# Altium PCB PMP9755.PcbDoc
Units mil, origin at the board's own origin, x right, y up, seen from the top; angles counter-clockwise.
Board outline 3100 x 2000 mil, 2 copper layers (L1 Top Layer, L2 Bottom Layer), stack 62 mil thick; 34 components, 15 nets, 92 pads, 25 vias.
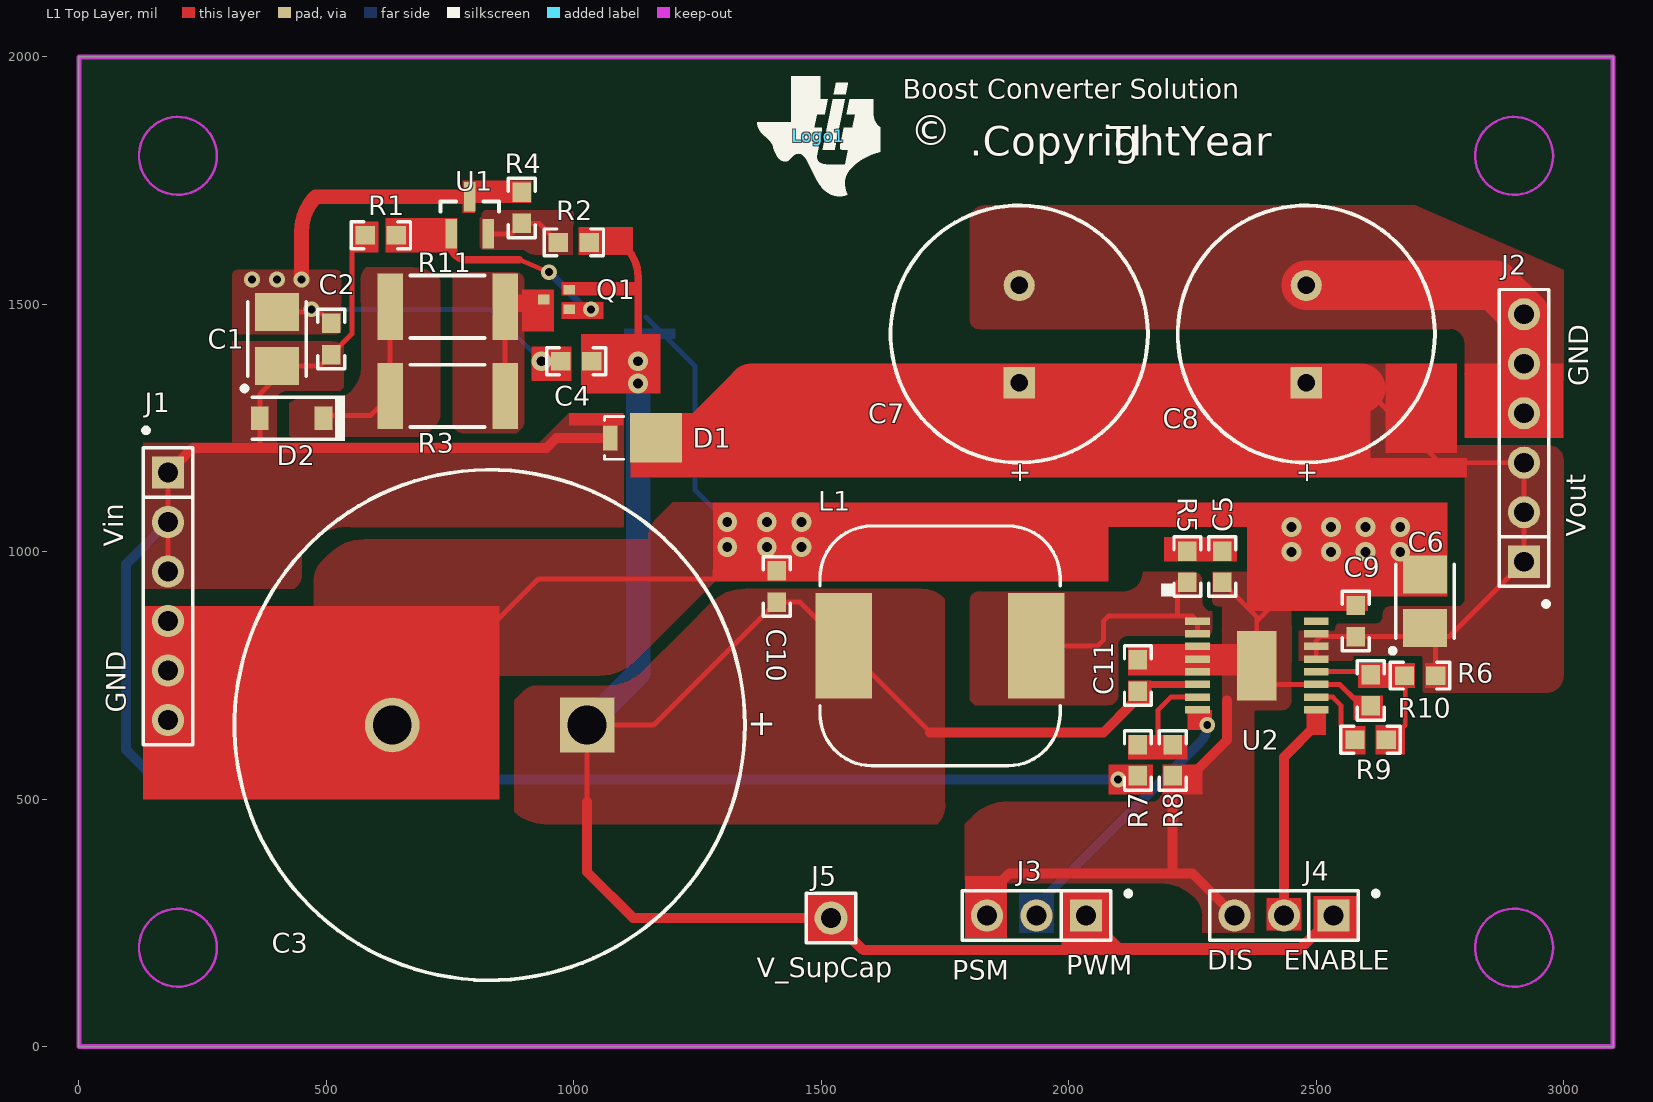
[diagram p0: L1 Top Layer view]
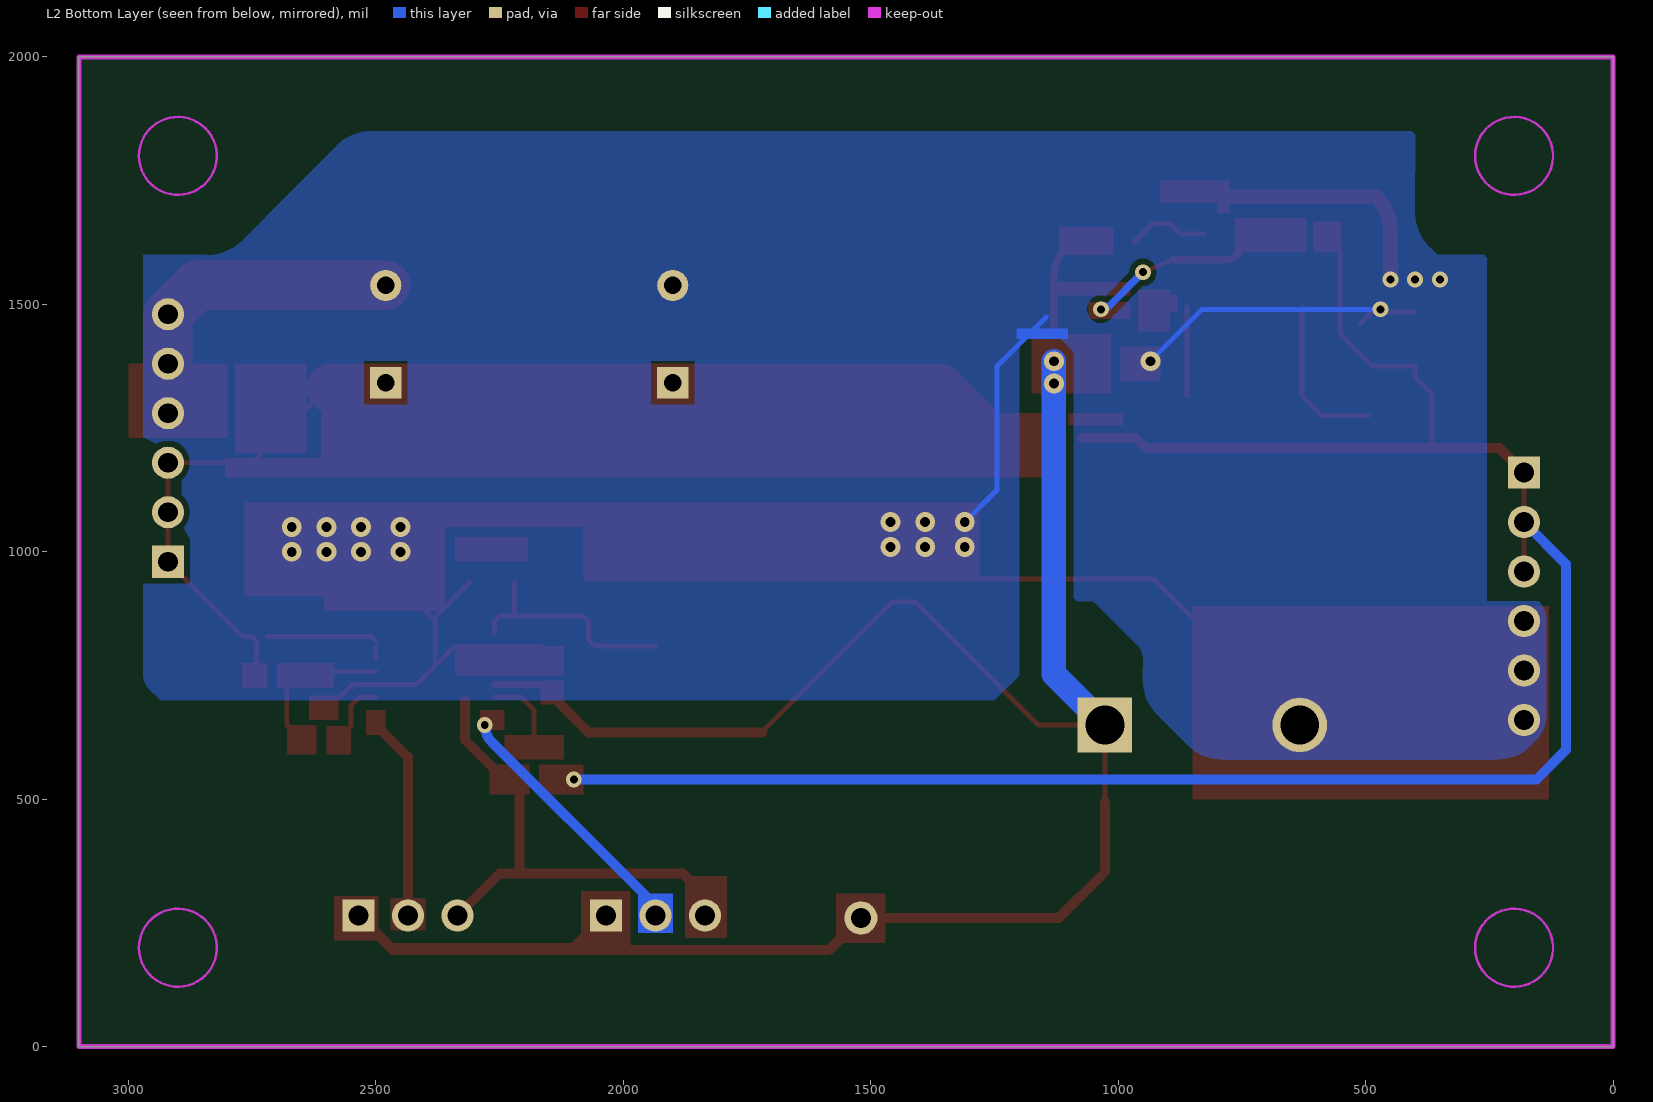
[diagram p1: L2 Bottom Layer view, seen from below]

## Layer stack, top to bottom
L1 Top Layer: signal copper 1.4
Dielectric: core 59.2, FR-4, Dk 4.8
L2 Bottom Layer: signal copper 1.4

## Board outline
0,0 3100,0 3100,2000 0,2000 0,0

## Design rules (kind name [scope] priority, off if disabled: settings)
AcuteAngle [All] p1: minimum=4.50000000000000E+0001 checktracksonly=FALSE
AssemblyTestPointUsage [All] p1: valid=2
Clearance Clearance_BoardEdge_MountingHoles [OnCopper and InComponentClass('Mounting Holes') vs IsKeepOut] p1: gap=40
Clearance Clearance_BoardEdge_Poly [OnCopper and InPoly vs IsKeepOut] p2: gap=25
Clearance Clearance_BoardEdge [OnCopper and Not InComponentClass('Logo') and not InComponentClass('FiducialMark') and not InRegion(1000,500,4000,800) and Not IsKeepout vs IsKeepOut] p3: gap=60
Clearance Clearance_Poly [InPolygon] p4: gap=12
Clearance [All] p5: gap=8
ComponentClearance ComponentClearance_Shunt [InComponentClass('Header') vs InComponentClass('Shunt')] p1: gap=0 collisioncheckmode=3 verticalgap=0 showdistances=FALSE
ComponentClearance ComponentClearance_Logo [InComponentClass('Logo')] p2: gap=50 collisioncheckmode=3 verticalgap=10 showdistances=FALSE
ComponentClearance ComponentClearance_ScrewToNut [(HasFootprint('NY PMS 440 0025 PH')) vs (HasFootprint('Keystone_1902C'))] p3: gap=5 collisioncheckmode=3 verticalgap=10 showdistances=FALSE
ComponentClearance ComponentClearance_MountingHoles [InComponentClass('Mounting Holes')] p4: gap=250 collisioncheckmode=3 verticalgap=100000 showdistances=FALSE
ComponentClearance ComponentClearance_SmallPassives [HasFootprint('0201*') or HasFootprint('0402*') or HasFootprint('0508') or HasFootprint('0603*') or HasFootprint('0612') or HasFootprint('0805*') or HasFootprint('0815*') or HasFootprint('0830*') or HasFootprint('1206*') or HasFootprint('1210*') or HasFootprint('1808*') or HasFootprint('1812*') or HasFootprint('1825*') or HasFootprint('2010*') or HasFootprint('2220*') or HasFootprint('2225*') or HasFootprint('2512*') or HasFootprint('2728*') or HasFootprint('3518*') vs HasFootprint('0201*') or HasFootprint('0402*') or HasFootprint('0508') or HasFootprint('0603*') or HasFootprint('0612') or HasFootprint('0805*') or HasFootprint('0815*') or HasFootprint('0830*') or HasFootprint('1206*') or HasFootprint('1210*') or HasFootprint('1808*') or HasFootprint('1812*') or HasFootprint('1825*') or HasFootprint('2010*') or HasFootprint('2220*') or HasFootprint('2225*') or HasFootprint('2512*') or HasFootprint('2728*') or HasFootprint('3518*')] p5: gap=20 collisioncheckmode=3 verticalgap=10 showdistances=FALSE
ComponentClearance ComponentClearance_THtoSMT [IsThruComponent vs IsSMTComponent] p6: gap=20 collisioncheckmode=3 verticalgap=30 showdistances=FALSE
ComponentClearance ComponentClearance_THtoTH [IsThruComponent vs IsThruComponent] p7: gap=20 collisioncheckmode=3 verticalgap=30 showdistances=FALSE
ComponentClearance [All] p8: gap=20 collisioncheckmode=3 verticalgap=10 showdistances=FALSE
DiffPairsRouting [All] p1: maxlimit=100 minlimit=10 mostfreqgap=10 maxuncoupledlength=1000
FabricationTestPointUsage TestPointUsage [All] p1: valid=2 allowmultiple=FALSE
FabricationTestpoint Testpoint [All] p1: side=3 testpointundercomponent=TRUE minsize=40 maxsize=100 preferedsize=60 minholesize=0 maxholesize=40 preferedholesize=32 testpointgrid=1 allowsidetop=TRUE allowsidebottom=TRUE usegrid=TRUE gridtolerance=0.01
FanoutControl Fanout_LCC [IsLCC] p1: bgadir=Out bgaviamode=Centered fanoutstyle=Auto fanoutdirection=Alternating viagrid=1 // Fanout_LCC (Default Rule)
FanoutControl Fanout_BGA [IsBGA] p2: bgadir=Out bgaviamode=Centered fanoutstyle=Auto fanoutdirection=Alternating viagrid=1 // Fanout_BGA (Default Rule)
FanoutControl Fanout_Default [All] p4: bgadir=Out bgaviamode=Centered fanoutstyle=Auto fanoutdirection=Alternating viagrid=1 // Fanout_Default (Default Rule)
FanoutControl Fanout_Small [(CompPinCount < 5)] p5: bgadir=Out bgaviamode=Centered fanoutstyle=Auto fanoutdirection=OutThenIn viagrid=1 // Fanout_Small (Default Rule)
HoleSize [All] p1: absolutevalues=TRUE maxlimit=251 minlimit=8 maxpercent=80.000 minpercent=20.000
MinimumAnnularRing MinimumAnnularRing_ThermalPadVias [IsVia and InAnyComponent] p1: minimumring=5.91
MinimumAnnularRing [All] p2: minimumring=9
MinimumSolderMaskSliver MinimumSolderMaskSliver_Logo [InComponentClass('Logo') vs InComponentClass('Logo')] p1: minsoldermaskwidth=0.7
MinimumSolderMaskSliver [All] p2: minsoldermaskwidth=3.94
PlaneConnect [All] p1: planeconnectstyle=Relief reliefexpansion=10 reliefentries=4 reliefconductorwidth=10 reliefairgap=10
PolygonConnect [All] p1: connectstyle=Direct reliefconductorwidth=10 reliefentries=4 polygonreliefangle="90 Angle" airgapwidth=10
RoutingVias ThermalPadVias [IsVia and InAnyComponent] p1: holewidth=7.87 width=19.68 viastyle="Through Hole" minholewidth=7.87 minwidth=19.68 maxholewidth=12.99 maxwidth=23.62
RoutingVias [All] p2: holewidth=16 width=34 viastyle="Through Hole" minholewidth=7.87 minwidth=26 maxholewidth=40 maxwidth=65
SMDToCorner [All] p1: distance=30000
SilkToSilkClearance [All] p1: silktosilkclearance=5
SilkscreenOverComponentPads [All] p1: minsilkscreentomaskgap=5
SolderMaskExpansion [All] p1: expansion=1.97
Width [All] p1: maxlimit=100 minlimit=6 preferedwidth=10 checkconnectedcopper=TRUE
14 further rules are at their usual default settings.

## Classes and differential pairs
component class Logo: Logo1
component class Header: J1 J2 J3 J4
component class PWP9755_Cover: Logo1

## Components (designator, comment, footprint, x,y, rotation, side; value= is the part's Value field where it differs from the comment)
C1 "T520B157M006ATE070" 3528-21 400,1430 r90 top
C2 "GRM188R61A225KE34D" 0603 510,1430 r90 top
C3 "HVZ0E107NF-LT" HV_2500x5000 830,650 r180 top
C4 "GRM188R60J225KE19D" 0603 1005,1385 r180 top
C5 "GRM1885C1H101JA01D" 0603 2310,970 r270 top
C6 "T520B157M006ATE070" 3528-21 2720,900 r90 top
C7 "EEUFR0J472" FR_1250x2500 1900,1440 r90 top
C8 "EEUFR0J472" FR_1250x2500 2480,1440 r90 top
C9 "GRM188R61C475KAAJ" 0603 2580,860 r90 top
C10 "GRM188R61A106ME69" 0603 1410,930 r90 top
C11 "GRM185R60J105KE26D" 0603 2140,750 r90 top
D1 "SS1P3L-M3/84A" DO-220AA 1120,1230 r180 top
D2 "MBR0520LT1G" SOD-123 430,1270 r180 top
J1 "TSW-106-07-G-S" TSW-106-07-G-S 180,910 r270 top
J2 "TSW-106-07-G-S" TSW-106-07-G-S 2920,1230 r90 top
J3 "TSW-103-07-G-S" TSW-103-07-G-S 1935,265 r180 top
J4 "TSW-103-07-G-S" TSW-103-07-G-S 2435,265 r180 top
J5 "TSW-101-17-T-S" Samtec_TSW-101-17-T-S 1520,260 r0 top
L1 "CDRH127NP-6R1NC" cdrh127 1740,810 r0 top
Logo1 "Boost Converter Solution" TI_Symbol_Overlay_Medium 1495,1840 r0 top
Q1 "SI1012CR-T1-GE3-ND" SOT-416 965,1510 r180 top
R1 "CRCW06031K00JNEA" 0603 610,1640 r0 top
R2 "RT0603BRD075K97L" 0603 1000,1625 r0 top
R3 "CRCW251249R9FKEG" 2512 745,1315 r0 top
R4 "RT0603DRE07100KL" 0603 895,1695 r90 top
R5 "CRCW0603100RJNEA" 0603 2240,970 r270 top
R6 "RC0603FR-071ML" 0603 2710,750 r0 top
R7 "RC0603FR-07909KL" 0603 2140,578.5 r90 top
R8 "RT0603DRE07100KL" 0603 2210,578.5 r90 top
R9 "RC0603FR-071ML" 0603 2610,620 r180 top
R10 "CRCW0603124KFKEA" 0603 2610,720 r90 top
R11 "CRCW251249R9FKEG" 2512 745,1495 r0 top
U1 "TL431AIDBZR" DBZ0003A_N 790,1680 r90 top
U2 "TPS61030PWP" PWP16 2380,770 r0 top

## Footprints (in the part's own frame and the unit in brackets; to place one, negate y for a bottom-side part, rotate by r counter-clockwise, add the part's x,y. Pads: shape width x height; smd on the part's side, far side on the other; paste and mask are expansions set on the pad)
0603 [mm] "0603 from SM-752 data"
  rect 1x0.95 smd: 1(-0.8,0) 2(0.8,0)
  silkscreen extent -1.52,-0.69 1.52,0.69, body extent -0.87,-0.47 0.87,0.47, height 0.85
2512 [mm] "Chip Resistor, Body 6.3x3.2mm, IPC Medium Density"
  rect 1.3x3.4 smd: 1(-2.95,0) 2(2.95,0)
  silkscreen extent -1.9,-1.6 1.9,1.6, body extent -3.22,-1.67 3.22,1.67, height 0.71
3528-21 [mm] "Medium Density IPC, based on SM-782 section 8.4"
  rect 1.95x2.25 smd: 1(-1.375,0) 2(1.375,0)
  silkscreen extent -2.66,-1.5 1.9,1.79, body extent -1.85,-1.5 1.85,1.5, height 2.1
cdrh127 [mm] "Sumida recommended land pattern"
  rect 2.9x5.4 smd: 1(-4.95,0) 2(4.95,0)
  silkscreen extent -6.16,-6.15 6.16,6.15, body extent -6.15,-6.15 6.15,6.15, height 8
DBZ0003A_N [mm] "SOT23, 3-Leads, Body 2.9x1.3mm, Pitch 0.95mm, Lead Span 2.4mm, IPC Medium Density"
  rect 1.5x0.6 smd: 1(-0.95,0.95) 2(-0.95,-0.95) 3(0.95,0)
  silkscreen extent 0.2,-1.5 0.7,1.5, body extent -1.26,-1.46 1.26,1.46, height 0.96
DO-220AA [mil] "Vishay recommended land pattern 12-Mar-12"
  rect 105.12x100 smd: 1(-46.28,0)
  rect 30x50 smd: 2(46.28,0)
  silkscreen extent 19,-43 58,43, body extent -96,-45 59,45, height 46
FR_1250x2500 [mm] "PANASONIC"
  rect 1.6x1.6 hole 0.9: 1(-2.5,0)
  round 1.6 hole 0.9: 2(2.5,0)
  silkscreen extent -6.6,-6.6 6.6,6.6, body extent -6.45,-6.49 6.49,6.49, height 27.01
HV_2500x5000 [mm] "KEMET"
  rect 2.8x2.8 hole 2: 1(-5,0)
  round 2.8 hole 2: 2(5,0)
  silkscreen extent -13.1,-13.1 13.1,13.1, body extent -12.9,-12.98 12.96,12.98, height 52.01
PWP16 [mil]
  rect 50x15 smd: 1(-119.8,90) 2(-119.8,64.4) 3(-119.8,38.8) 4(-119.8,13.2) 5(-119.8,-12.4) 6(-119.8,-38) 7(-119.8,-63.6) 8(-119.8,-89.2) 9(120.2,-89.2) 10(120.2,-63.6) 11(120.2,-38) 12(120.2,-12.4) 13(120.2,13.2) 14(120.2,38.8) 15(120.2,64.4) 16(120.2,90)
  rect 80x140 smd: 17(0,0)
  silkscreen extent -193,140 -168,166
Samtec_TSW-101-17-T-S [mm] "Samtec,CONN HEADER 1POS .100\" SNGL TIN"
  round 1.7 hole 1.02 mask+0.05: 1(0,0)
  silkscreen extent -1.27,-1.27 1.27,1.27, body extent -1.27,-1.27 1.27,1.27, height 18.29
SOD-123 [mm] "On Semi recommended land pattern"
  rect 0.915x1.22 smd: 1(-1.637,0) 2(1.637,0)
  silkscreen extent -2.74,-1.17 2.03,1.17, body extent -1.93,-0.9 1.93,0.9, height 1.35
SOT-416 [mm] "NXP recommended footprint."
  rect 0.6x0.5 smd: 1(-0.65,0.5) 2(-0.65,-0.5) 3(0.65,0)
  body extent -0.8,-0.9 0.8,0.9, height 0.82
TI_Symbol_Overlay_Medium [mil]
  silkscreen extent -124,-122 124,120
TSW-103-07-G-S [mm] "Samtec 100mil, 1x3, 230 mil above insulator"
  rect 1.65x1.65 hole 1.016 mask+0: 1(-2.54,0)
  round 1.65 hole 1.016 mask+0: 2(0,0) 3(2.54,0)
  silkscreen extent -4.84,-1.27 3.81,1.27, body extent -3.81,-1.27 3.81,1.27, height 8.38
TSW-106-07-G-S [mm] "Samtec 100mil, 1x6, 230 mil above insulator"
  rect 1.65x1.65 hole 1.016 mask+0: 1(-6.35,0)
  round 1.65 hole 1.016 mask+0: 2(-3.81,0) 3(-1.27,0) 4(1.27,0) 5(3.81,0) 6(6.35,0)
  silkscreen extent -8.64,-1.27 7.62,1.27, body extent -7.62,-1.27 7.62,1.27, height 8.38

## Part data
C1 C6: "CAP, TA, 150uF, 6.3V, +/-20%, 0.07 ohm, SMD"
C2: "CAP, CERM, 2.2uF, 10V, +/-10%, X5R, 0603"
C3: "CAP, Electric Double Layer, 100 F, 2.7 V, +30/-50%, 0.03 ohm, TH"
C4: "CAP, CERM, 2.2uF, 6.3V, +/-10%, X5R, 0603"
C5: "CAP, CERM, 100pF, 50V, +/-5%, C0G/NP0, 0603"
C7 C8: "CAP, AL, 4700uF, 6.3V, +/-20%, 0.015 ohm, TH"
C9: "CAP, CERM, 4.7 µF, 16 V, +/- 10%, X5R, 0603"
C10: "CAP, CERM, 10uF, 10V, +/-20%, X5R, 0603"
C11: "CAP, CERM, 1uF, 6.3V, +/-10%, X5R, 0603"
D1: "Diode, Schottky, 30V, 1.5A, DO-220AA"
D2: "Diode, Schottky, 20V, 0.5A, SOD-123"
J1 J2: "Header, TH, 100mil, 6x1, Gold plated, 230 mil above insulator"
J3 J4: "Header, TH, 100mil, 3x1, Gold plated, 230 mil above insulator"
J5: "CONN HEADER 1POS .100\" SNGL TIN, TH"
L1: "Inductor, Shielded Drum Core, Ferrite, 6.1uH, 6.6A, 0.0176 ohm, SMD"
Logo1: library part TI_Logo, "Texas Instrument Corporate Signature"
Q1: "MOSFET, N/P-CH, 20V, 0.63A, SOT-416"
R1: "RES, 1.0k ohm, 5%, 0.1W, 0603"
R2: "RES, 5.97k ohm, 0.1%, 0.1W, 0603"
R3 R11: "RES, 49.9 ohm, 1%, 1W, 2512"
R4 R8: "RES, 100k ohm, 0.5%, 0.1W, 0603"
R5: "RES, 100 ohm, 5%, 0.1W, 0603"
R6 R9: "RES, 1.00Meg ohm, 1%, 0.1W, 0603"
R7: "RES, 909k ohm, 1%, 0.1W, 0603"
R10: "RES, 124k ohm, 1%, 0.1W, 0603"
U1: "Adjustable Precision Shunt Regulator, 34 ppm / degC, 100 mA, -40 to 85 degC, 3-pin SOT-23 (DBZ), Green (RoHS & no Sb/Br)"
U2: "IC, Li ION, Boost converter, Adj V."

## Via types
v1: diameter 40, hole 20, L1 Top Layer to L2 Bottom Layer, 17 vias
v2: diameter 32, hole 16, L1 Top Layer to L2 Bottom Layer, 8 vias

## Nets (pads, with @x,y where several pads share a name; then routed paths per layer and width w, separated by ;. In a path a pad name is that pad's centre, name@x,y a point inside that pad or via, vN(x,y) a via of type N, cw(c..) or ccw(c..) an arc to the next point about the centre after c; other vN are vias at no path point)
EN: J4.2 U2.9 | length 411.9
  L1 Top Layer w20: J4.2 2435,585 2500,650
GND: C1.2 C2.2 C3.2 C4.2 C5.2 C6.2 C7.2 C8.2 C9.2 C10.2 C11.2 J1.4 J1.5 J1.6 J2.4 J2.5 J2.6 J3.3 J4.3 R4.2 R8.1 R10.1 U1.3 U2.3 U2.4 U2.5 U2.11 U2.17 | length 5382
  L1 Top Layer w10: C1.2 487.36,1484.13 C2.2 ; C3.2 928.15,945 1290,945 ; U1.3 885.91,1717.4 R4.2 R4.2@898.5,1730 ; v1(935,1385) C4.2 ; C11.2 2167.3,808.8 U2.3 ; U2.5 U2.4 U2.3 ; C5.2 2380,868.5 2380,860 ; R10.1@2610,698.5 2581.5,698.5 2548,732 U2.11 2418,732 U2.17 ; C6.2 2632.64,954.13 2570,891.5 2411.5,891.5 2380,860 ; U2.3 2341.2,808.8 U2.17 ; U2.17 2380,860
  L1 Top Layer w20: J3.3 1835,305 1880,350 2250,350 J4.3 ; 2210,355 R8.1 2247.01,547.01 2320,620 2320,700
  L1 Top Layer w30: v2(450,1550) 450,1647.82 cw(c548.41,1647.82) 478.82,1717.4 U1.3
  L1 Top Layer w100: C8.2 2861.57,1538.43 J2.6 J2.5 J2.4
  L2 Bottom Layer w10: v2(470,1490) 830,1490 v1(935,1385) ; C3.2@623.15,660 C3.2 ; 1145,1475 1245,1375 1245,1125 v1(1310,1060)
  L2 Bottom Layer w20: J4.3@2325,255 J4.3
  other v1: 2450,1000 2530,1000 2600,1000 2670,1000 1310,1010 1390,1010 1460,1010 2450,1050 2530,1050 2600,1050 2670,1050 1390,1060 1460,1060
  other v2: 350,1550 400,1550
NetC5_1: C5.1 R5.1 | length 90
  L1 Top Layer w10: 2220,1001.5 C5.1
NetD2_1: D2.1 R3.1 R11.1 | length 331
  L1 Top Layer w10: D2.1@494.47,1275 588.86,1275 R3.1 R11.1
NetL1_2: L1.2 R5.2 U2.1 U2.2 | length 471
  L1 Top Layer w10: L1.2 2058.5,810 2070,821.5 2070,860 2080,870 2220,870 ; 2220,938.5 2220,870 ; U2.2 U2.1 2250.2,870 2220,870
NetQ1_1: Q1.1 R1.2 U1.1 | length 468.2
  L1 Top Layer w10: R1.2 750,1640 U1.1 ; 890,1590 v2(950,1565)
  L1 Top Layer w15: U1.1 752.6,1617.87 ccw(c777.87,1617.87) 752.6,1617.4 ccw(c777.87,1617.87) 760,1600 ccw(c784.14,1624.14) 779.71,1590.29 ccw(c784.14,1624.14) 784.14,1590 890,1590
  L2 Bottom Layer w15: v2(950,1565) 1019.5,1495.5 v2@1035,1495.5
  other v2: 1035,1490
NetQ1_3: Q1.3 R3.2 R11.2 | length 180
  L1 Top Layer w10: R3.2 R11.2
NetR2_1: R2.1 R4.1 U1.2 | length 165.7
  L1 Top Layer w10: U1.2 874.09,1642.6 R4.1 930,1663.5 R2.1
NetR6_1: R6.1 R9.1 R10.2 U2.12 | length 302.8
  L1 Top Layer w10: U2.12 2501.1,758.5 2680,758.5 2680,650.02 2669.98,640
NetR7_2: R7.2 R8.2 U2.7 | length 221.1
  L1 Top Layer w10: R7.2 R8.2 ; 2180,620 2180,680 2206.4,706.4 U2.7
NetR9_2: R9.2 U2.10 | length 138.4
  L1 Top Layer w10: U2.10 2533.6,706.4 2550,690 2550,648.5 R9.2
SYNC: J3.2 U2.8 | length 523.7
  L2 Bottom Layer w20: J3.2 cw(c1983.28,265) 1949.14,299.14 2265.86,615.86 ccw(c2231.72,650) v2(2280,650)
V_SUP: C3.1 C4.1 C10.1 C11.1 J3.1 J4.1 J5.1 L1.1 Q1.2 R2.2 U2.6 | length 5003.5
  L1 Top Layer w10: 1026.85,495 C3.1 1161.5,650 C10.1 1456.61,898.5 L1.1 1720,635.12 ; R2.2@1028.7,1628.52 1091.25,1628.52 ; C4.1 v1(1130,1385) ; 1117.4,1402.6 v1@1120,1400
  L1 Top Layer w14: C11.1 cw(c2153.5,718.5) 2153.5,732 U2.6
  L1 Top Layer w15: 1105,1615 cw(c1044.64,1554.64) 1130,1554.64 v1(1130,1385)
  L1 Top Layer w20: 1026.85,495 1026.85,353.15 1120,260 J5.1 1585,195 2465,195 2470,200 ; 1720,635.12 2070.12,635.12 2130,695 ; J3.1 2100,200 2470,200 ; J4.1 2470,200
  L2 Bottom Layer w50: C3.1 1130,753.15 v1(1130,1340) v1(1130,1385)
VOUT: C6.1 C7.1 C8.1 C9.1 D1.1 J2.1 J2.2 J2.3 R6.2 U2.13 U2.14 U2.15 | length 2608.2
  L1 Top Layer w10: 2500,820 2508.5,828.5 2570,828.5 C6.1@2720,828.5 ; U2.13 U2.14 ; 2595,1335 2750,1180 J2.3 J2.2 J2.1 2768.5,828.5 2750,828.5 2741.5,820 R6.2@2741.5,760
  L1 Top Layer w100: D1.1 1260,1230 1360,1330 2590,1330
VSYS: C1.1 C2.1 D1.2 D2.2 J1.1 J1.2 J1.3 R1.1 R7.1 | length 4217.4
  L1 Top Layer w10: J1.3 J1.2 J1.1 ; 365,1210 365.53,1210.53 365.53,1275 365.53,1318.03 400,1352.5 C1.1 487.36,1375.87 C2.1 551.5,1440 551.5,1612.99 R1.1
  L1 Top Layer w20: J1.1 230,1210 365,1210 945,1210 965,1230 D1.2
  L2 Bottom Layer w20: J1.2 95,975 95,600 155,540 v2(2100,540)
pads on no net: U2.16

## Polygon pours and split planes (outlines as drawn)
VOUT on L1 Top Layer "L1 Top Layer-No Net 12" (solid, pour order 33): 2595,1380 2640,1380 2670,1380 cw(c2670,1350) 2700,1350 2700,1240 ccw(c2725,1240) 2725,1215 2824.02,1215 2824.02,1199.02 cw(c2800,1199.02) 2800,1175 2615,1175 cw(c2615,1180) 2610,1180 cw(c2610,1195) 2595,1195 2595,1380
VOUT on L1 Top Layer "L1 Top Layer-No Net 11" (solid, pour order 32): 2465,840 2465,780 2560,780 2570,780 ccw(c2570,785) 2575,785 2575,790 2710,790 cw(c2710,785) 2715,785 2715,780 2715,720 ccw(c2720,720) 2720,715 2965,715 ccw(c2965,750) 3000,750 3000,1185 ccw(c2970,1185) 2970,1215 2825,1215 ccw(c2825,1190) 2800,1190 2800,905 cw(c2785,905) 2785,890 2650,890 ccw(c2650,875) 2635,875 2635,870 cw(c2620,870) 2620,855 2545,855 ccw(c2545,850) 2540,850 cw(c2530,850) 2530,840 2465,840
GND on L1 Top Layer "L1 Top Layer-No Net 10" (solid, pour order 31): 2290,950 2290,960 2450,960 2450.18,840 2310,840 2310,890 2300,890 cw(c2300,900) 2290,900 2290,960
NetL1_2 on L1 Top Layer "L1 Top Layer-No Net 9" (solid, pour order 29): 1800,890 1800,900 cw(c1820,900) 1820,920 2110,920 ccw(c2110,960) 2150,960 2250,960 cw(c2250,940) 2270,940 2270,930 2270,900 ccw(c2290,900) 2290,880 2290,840 cw(c2280,840) 2280,830 2120,830 ccw(c2120,810) 2100,810 2100,710 cw(c2080,710) 2080,690 1810,690 1800,700 1800,890
GND on L1 Top Layer "L1 Top Layer-No Net 8" (solid, pour order 27): 1800,1460 1800,1670 cw(c1830,1670) 1830,1700 2700,1700 3000,1570 3000,1360 3000,1350 cw(c2970,1350) 2970,1320 2840,1320 cw(c2840,1360) 2800,1360 2800,1420 ccw(c2770,1420) 2770,1450 1820,1450 cw(c1820,1470) 1800,1470
GND on L1 Top Layer "L1 Top Layer-No Net 6" (solid, pour order 25): 2330,860 ccw(c2330,840) 2310,840 2310,830 2310,690 ccw(c2320,690) 2320,680 2430,680 ccw(c2430,700) 2450,700 2450,850 ccw(c2440,850) 2440,860 2330,860
GND on L1 Top Layer "L1 Top Layer-No Net 1" (solid, pour order 23): 530,1440 320,1440 cw(c320,1450) 310,1450 310,1560 cw(c320,1560) 320,1570 520,1570 cw(c520,1560) 530,1560 530,1450 cw(c520,1450) 520,1440
VSYS on L1 Top Layer "L1 Top Layer-No Net" (solid, pour order 19): 130,925 130,1220 930,1220 990,1280 997,1273 1100.9,1273 1100.9,1050.9 1100,1050 550,1050 541.42,1050 ccw(c541.42,950) 470.71,1020.71 450,1000 450,950 cw(c425.86,950) 442.93,932.93 435,925 130,925
GND on L1 Top Layer "L1 Top Layer-No Net 2" (solid, pour order 20): 1280,1100 1200,1100 1167.68,1067.68 ccw(c1210.36,1025) 1150,1025 576.42,1025 ccw(c576.42,925) 505.71,995.71 490,980 ccw(c526.21,943.79) 475,943.79 475,890 1193.58,890 ccw(c1193.58,990) 1264.29,919.29 1290,945 cw(c1314.14,969.14) 1280,969.14 1280,1100
GND on L1 Top Layer "L1 Top Layer-No Net 3" (solid, pour order 21): 775,750 1053.58,750 ccw(c1053.58,850) 1124.29,779.29 1288.79,943.79 cw(c1279.64,952.93) 1279.64,940 775,940 775,750
V_SUP on L1 Top Layer "L1 Top Layer-No Net 4" (solid, pour order 22): 880,700 899.39,719.39 cw(c925,693.79) 925,730 1068.58,730 ccw(c1068.58,830) 1139.29,759.29 1225,845 1275.71,895.71 cw(c1346.42,825) 1346.42,925 1435,925 1701.72,925 cw(c1701.72,856.72) 1750,905 1750,500 1750,486.21 cw(c1698.79,486.21) 1735,450 1000,450 940.36,450 cw(c940.36,535.36) 880,475 880,700
VSYS on L1 Top Layer "L1 Top Layer-No Net 5" (solid, pour order 24): 310,1425 510.86,1425 cw(c510.86,1390.86) 535,1415 535,1325 424.14,1325 ccw(c424.14,1290.86) 400,1315 400,1215 310,1215 310,1425
NetD2_1 on L1 Top Layer "L1 Top Layer-No Net 7" (solid, pour order 26): 425,1280 425,1300 cw(c449.14,1275.86) 449.14,1310 450,1310 513.79,1310 ccw(c513.79,1361.21) 550,1325 ccw(c501.72,1373.28) 570,1373.28 570,1455 570,1550.86 cw(c604.14,1550.86) 580,1575 675,1575 cw(c675,1502.57) 726.21,1553.79 730,1550 730,1275 cw(c705.86,1275) 722.93,1257.93 700,1235 cw(c687.93,1247.07) 687.93,1230 440,1230 437.07,1230 cw(c437.07,1247.07) 425,1235 425,1280
NetQ1_3 on L1 Top Layer "L1 Top Layer-No Net 13" (solid, pour order 28): 755,1565 882.93,1565 cw(c882.93,1547.93) 895,1560 cw(c882.93,1547.93) 900,1547.93 900,1260 cw(c887.93,1260) 896.46,1251.46 885,1240 775,1240 cw(c775,1259.29) 761.36,1245.65 755,1252.01 755,1565
NetR2_1 on L1 Top Layer "L1 Top Layer-No Net 14" (solid, pour order 30): 810,1675 cw(c822.07,1675) 813.54,1683.54 820,1690 990,1690 cw(c990,1677.93) 998.54,1686.46 1000,1685 1000,1600 924.14,1600 cw(c924.14,1634.14) 900,1610 820,1610 cw(c820,1622.07) 811.46,1613.54 810,1615 810,1675
GND on L1 Top Layer "L1 Top Layer-No Net 16" (solid, pour order 34): 2375,230 2375,685 2320,685 2320,620 2315,620 2215,520 2205,510 2190,510 2178.54,498.54 cw(c2170,507.07) 2170,495 1876.42,495 ccw(c1876.42,395) 1805.71,465.71 1790,450 1790,330 2183.58,330 cw(c2183.58,230) 2254.29,300.71 2255,300 cw(c2218.79,263.79) 2270,263.79 2270,230 2375,230
GND on L2 Bottom Layer "L4 Bottom Layer-No Net 3" (solid, pour order 43): 905,1615 1170,1615 1170,1536.42 cw(c1070,1536.42) 1140.71,1465.71 1115,1440 cw(c1090.86,1464.14) 1090.86,1430 890,1430 890,1578.79 cw(c941.21,1578.79) 905,1615
GND on L2 Bottom Layer "L4 Bottom Layer-No Net 2" (solid, pour order 41): 1059.46,1475.88 ccw(c1059.46,1467.24) 1053.35,1473.35 1020,1440 1020,900 1090,900 1090,1400 cw(c1102.07,1400) 1093.54,1408.54 1115,1430 1115,1450 cw(c1115,1521.61) 1064.36,1470.97 1059.46,1475.88
GND on L2 Bottom Layer "L4 Bottom Layer-No Net" (solid, pour order 35): 150,900 149.14,899.14 ccw(c183.28,865) 135,865 135,668.28 ccw(c203.28,668.28) 155,620 165.71,609.29 ccw(c236.42,680) 236.42,580 250,580 788.58,580 ccw(c788.58,680) 859.29,609.29 900,650 920.71,670.71 ccw(c850,741.42) 950,741.42 950,785 cw(c986.21,785) 960.61,810.61 1050,900 1050,1700 1050,1850 400,1850 400,1686.42 cw(c300,1686.42) 370.71,1615.71 355,1600 295,1600 250,1600 cw(c237.93,1587.93) 255,1587.93 255,920 255,900 145,900
GND on L2 Bottom Layer "L4 Bottom Layer-No Net 1" (solid, pour order 36): 1050,1850 2508.58,1850 cw(c2508.58,1750) 2579.29,1820.71 2675,1725 2770.71,1629.29 ccw(c2841.42,1700) 2841.42,1600 2910,1600 2970,1600 2970,750 cw(c2933.79,750) 2959.39,724.39 2935,700 1250,700 1200,750 1200,1420 1170,1450 1085,1450 ccw(c1085,1425.86) 1067.93,1442.93 1045,1420

## Keep-outs
Keep-Out Layer:
  circle w5: c2900,200 r78.74
  circle w5: c200,200 r78.74
  circle w5: c200,1800 r78.74
  circle w5: c2900,1800 r78.74
  lines w10: 0,0 3100,0 3100,2000 0,2000 0,0
  text ".Layer_Name" at 577,-858.49 h60

## Other copper
L1 Top Layer:
  rectangle net NetQ1_3: 895,1445 960,1530
  rectangle net GND: 130,500 850,890
  rectangle net VOUT: 1115,1150 1295,1195
  rectangle net VOUT: 2560,1150 2805,1190
  rectangle net VOUT: 1270,1150 2610,1310
  rectangle net GND: 2552.73,910 2765,1050
  rectangle net GND: 2360,880 2605,1055
  rectangle net GND: 1510,940 2080,1060
  rectangle net GND: 1510,1050 2765,1100
  rectangle net VOUT: 2720,725 2769.98,775
  rectangle net GND: 2575,660.02 2635,710
  rectangle net NetR6_1: 2585,725 2700,775
  rectangle net NetR6_1: 2620,590 2680,650
  rectangle net NetR9_2: 2550,590 2600,648.5
  rectangle net GND: 2190,510 2270,570
  rectangle net EN: 2480,630 2520,680
  rectangle net SYNC: 2240,640 2290,680
  rectangle net VSYS: 2080,510 2170,570
  rectangle net NetR7_2: 2120,580 2240,630
  rectangle net GND: 2120,750 2340,810
  rectangle net V_SUP: 2120,691.55 2167.2,740
  rectangle net NetC5_1: 2192.8,980 2340,1029.98
  rectangle net GND: 2800,1230 3000,1380
  rectangle net GND: 1280,940 1510,1100
  rectangle net V_SUP: 2495,215 2585,305
  rectangle net V_SUP: 1009.88,1599.65 1120,1655.83
  rectangle net VSYS: 990,1255 1100,1280
  rectangle net GND: 915,1345 995,1415
  rectangle net V_SUP: 1015,1320 1175,1440
  rectangle net NetQ1_1: 620,1605 765,1675
  rectangle net VSYS: 550.02,1605 605,1667.27
  rectangle net V_SUP: 1470,210 1570,310
  rectangle net V_SUP: 1985,195 2085,315
  rectangle net GND: 1790,220 1875,345
  rectangle net GND: 775,1685 800,1750
  rectangle net GND: 800,1705 915,1750
  rectangle net VOUT: 2640,1200 2785,1380
  rectangle net NetQ1_3: 880,1485 955,1520
  rectangle net V_SUP: 975,1518.24 1130,1545
  rectangle net NetQ1_1: 975,1470 1060,1505
  rectangle net EN: 2400,235 2470,300
  text ".Layer_Name" at 577,-858.49 h60
L2 Bottom Layer:
  rectangle net GND: 1100.96,1430 1205,1451.04
  rectangle net SYNC: 1900,230 1970,310
  text ".Layer_Name" at 577,-858.49 h60

## Silkscreen, mask and mechanical layers (free items; w line width, h text height)
Top Overlay:
  text "©" at 1680,1801.48 h105
  text ".CopyrightYear" at 1800,1800 h60
  text "TI" at 2076,1800 h60
  text "GND" at 3050,1335 h40 r90
  text "Vout" at 3045,1030 h40 r90
  text "Vin" at 90,1010 h40 r90
  text "GND" at 95,675 h40 r90
  text "DIS" at 2280,155 h40
  text "ENABLE" at 2435,155 h40
  text "PWM" at 1995,145 h40
  text "V_SupCap" at 1370,140 h40
  text "PSM" at 1765,135 h40
  text ".Layer_Name" at 577,-858.49 h60
Bottom Overlay:
  text ".Layer_Name" at 577,-858.49 h60
Top Paste:
  text ".Layer_Name" at 577,-858.49 h60
Bottom Paste:
  text ".Layer_Name" at 577,-858.49 h60
Top Solder:
  text ".Layer_Name" at 577,-858.49 h60
  text ".Layer_Name" at 577,-858.49 h60
Bottom Solder:
  text ".Layer_Name" at 577,-858.49 h60
Drill Guide:
  text ".Layer_Name" at 577,-858.49 h60
M1 Board Outline:
  circle w5: c2900,200 r78.74
  circle w5: c200,200 r78.74
  circle w5: c200,1800 r78.74
  circle w5: c2900,1800 r78.74
  lines w10: 0,0 0,2000 3100,2000 3100,0 0,0
  text ".Layer_Name" at 577,-858.49 h60
M3 3D STEP Top:
  text ".Layer_Name" at 577,-858.49 h60
M4 3D STEP Bottom:
  text ".Layer_Name" at 577,-858.49 h60
M5 Assembly Top:
  lines w10: -292,-930.17 6308,-930.17 ; -292,-726.83 6310,-726.83 ; -292,-523.5 -292,-1133.5 3713,-1133.5 6310,-1133.5 6310,-523.5 -291.5,-523.5 -291.5,-1133.5 1284,-1133.5 ; 2173,-1133.5 2173,-523.5 ; 3440,-726.83 3440,-523.5 ; 4280,-726.83 4280,-523.5 ; 4902,-1140 4902,-937.17
  text "COMPONENTS MARKED 'DNP' SHOULD NOT BE POPULATED." at 1153.5,-318.5 h60
  text "ASSEMBLY VARIANT:" at 1153,-434 h60
  text ".VariantName" at 2189,-434 h60
  text "PCB VIEWED FROM TOP SIDE" at -228.5,-655.67 h60
  text "BOARD #:" at 2248,-655.67 h60
  text ".PRJ_Number" at 2793.5,-655.67 h60
  text "REV:" at 3638,-655.67 h60
  text ".PCB_Rev" at 3929.5,-655.67 h60
  text "SVN REV:" at 4476,-655.67 h60
  text ".VersionControl_RevNumber" at 4982,-655.67 h60
  text "IGNORE ->" at -228.5,-858.49 h60
  text "PLOT NAME =" at -228.5,-1064.34 h60
  text ".plot_File_Name" at 577,-1064.34 h60
  text "GENERATED    :" at 2250,-1064.34 h60
  text ".Print_Date" at 3119.5,-1064.34 h60
  text ".Print_Time" at 3848.5,-1064.34 h60
  text "TEXAS INSTRUMENTS" at 5113,-1064.34 h60
M6 Assembly Bottom:
  lines w10: -292.5,-727.33 6309.5,-727.33 ; -290.5,-930.67 6309.5,-930.67 ; 1115.5,-1140.5 1115.5,-937.67 ; 1737.5,-727.33 1737.5,-524 ; 2577.5,-727.33 2577.5,-524 ; 3844.5,-1134 3844.5,-524 ; 4733.5,-1134 6309,-1134 6309,-524 -292.5,-524 -292.5,-1134 2304.5,-1134 6309.5,-1134 6309.5,-524
  text "COMPONENTS MARKED 'DNP' SHOULD NOT BE POPULATED." at 6102,-318 h60
  text ".VariantName" at 5058,-434 h60
  text "ASSEMBLY VARIANT:" at 6097,-434 h60
  text ".VersionControl_RevNumber" at 1035.5,-656.17 h60
  text "SVN REV:" at 1541.5,-656.17 h60
  text ".PCB_Rev" at 2088,-656.17 h60
  text "REV:" at 2379.5,-656.17 h60
  text ".PRJ_Number" at 3224,-656.17 h60
  text "BOARD #:" at 3769.5,-656.17 h60
  text "PCB VIEWED FROM BOTTOM SIDE" at 6246,-656.17 h60
  text "IGNORE ->" at 2547.85,-858.49 h60
  text "TEXAS INSTRUMENTS" at 904.5,-1064.84 h60
  text ".Print_Time" at 2169,-1064.84 h60
  text ".Print_Date" at 2898,-1064.84 h60
  text "GENERATED    :" at 3767.5,-1064.84 h60
  text ".plot_File_Name" at 5440.5,-1064.84 h60
  text "PLOT NAME =" at 6246,-1064.84 h60
M9 Title Sheet:
  drawing of 57 lines, arcs and shapes, not listed
  text "1" at 739.84,8036.5 h70
  text "2" at 3235.5,8036.5 h70
  text "3" at 5724.84,8036.5 h70
  text "4" at 8231.51,8036.5 h70
  text "5" at 10730.5,8036.5 h70
  text "6" at 13235.5,8036.5 h70
  text "A" at -416.5,6893.5 h70
  text "A" at 14383.5,6893.5 h70
  text "B" at -416.5,4513.5 h70
  text "B" at 14383.5,4513.5 h70
  text "C" at -416.5,2138.5 h70
  text "C" at 14383.5,2138.5 h70
  text "PROJECT TITLE:" at 11343.5,277.5 h45
  text ".PRJ_Title" at 11393.5,144.17 h70
  text "DESIGNED FOR:" at 11343.5,-23.5 h45
  text ".PRJ_Customer" at 11393.5,-163.5 h70
  text "D" at -416.5,-231.5 h70
  text "D" at 14383.5,-231.5 h70
  text "FILE NAME:" at 11343.5,-323.5 h45
  text ".PCB_File_Name_No_Path" at 11393.5,-443.5 h70
  text "Texas Instruments (TI) and/or its licensors do not warrant the accuracy or completeness of this specification" at 6374,-605.34 h45
  text "ENGINEER:" at 11343.5,-613.5 h45
  text "LAYOUT BY:" at 12848.5,-613.5 h45
  text "or any information contained therein. TI and/or its licensors do not warrant that this design will meet" at 6329.01,-718 h45
  text ".PRJ_Engineer" at 11393.5,-768.49 h70
  text ".PCB_Layout" at 12899,-768.49 h70
  text "the specifications, will be suitable for your application or fit for any particular purpose, or will operate in" at 6329.01,-830.67 h45
  text ".Layer_Name" at 577,-858.49 h60
  text "ALTIUM DESIGNER VERSION:" at 12848.5,-923.5 h45
  text "an implementation. TI and/or its licensors do not warrant that the design is production worthy. You should" at 6329.01,-943.33 h45
  text "completely validate and test your design implementation to confirm the system functionality for your application." at 6374,-1056 h45
  text ".print_Scale" at 11393.5,-1056.83 h70
  text ".Application_BuildNumber" at 12899,-1056.83 h70
  text "1" at 739.84,-1263.5 h70
  text "2" at 3235.5,-1263.5 h70
  text "3" at 5724.84,-1263.5 h70
  text "4" at 8231.51,-1263.5 h70
  text "5" at 10730.5,-1263.5 h70
  text "6" at 13235.5,-1263.5 h70
M10 Fab Notes:
  drawing of 212 lines, arcs and shapes, not listed
  text "DESIGN INFORMATION" at 12381.02,6810 h60
  text "(REFER ALSO ARRAY/PANEL PROFILING INFORMATION)" at 12019.46,6648.29 h60
  text "BOARD SIZE" at 11333.46,6644 h60
  text "3100MIL" at 11795.78,6516.18 h60
  text "X" at 12301.46,6516.18 h60
  text "2000MIL" at 12532.78,6516.18 h60
  text "Number of Layers :" at 11736.46,6319 h60
  text "2" at 12831.27,6309 h60
  text "MIN. TRACK WIDTH:" at 11736.46,6180 h60
  text "8" at 12832.7,6180 h60
  text "MIL" at 12987.46,6180 h60
  text "MIN. CLEARANCE:" at 11736.46,6048 h60
  text "8" at 12832.7,6048 h60
  text "MIL" at 12987.46,6048 h60
  text "MIN. VIA PAD SIZE:" at 11736.46,5916 h60
  text "32" at 12802.71,5916 h60
  text "MIL" at 12987.46,5916 h60
  text "0.05mm (2MIL)" at 12431.46,5774.29 h60
  text "MINIMUM ANNULAR RING" at 11407.23,5770 h60
  text "EXTERNAL" at 13139.46,5770 h60
  text "PER" at 11607.23,5652 h60
  text "IPC-D-275 CLASS 2 LEVEL C" at 11827.23,5652 h60
  text "MIL, HOLES" at 13315.46,5539.71 h60
  text "+/-" at 12923,5539 h60
  text "+/-" at 13777,5539 h60
  text "REGISTRATION TOLERANCES:" at 11407.23,5534 h60
  text "METAL" at 12607,5534 h60
  text "5" at 13183.2,5534 h60
  text "3" at 14016.2,5534 h60
  text "MIL" at 14132.46,5534 h60
  text "MATERIAL:" at 11332.46,5324.54 h60
  text "FR-4 High Tg" at 12318.9,5184.21 h60
  text "FR-4" at 11753.46,5175.64 h60
  text "OTHER" at 13241.46,5175.64 h60
  text "X" at 11605.46,5170.64 h60
  text "62 MIL (1.6mm) +/-10%" at 12073.56,5012.92 h60
  text "THICKNESS:" at 11407.23,5008.64 h60
  text "X" at 11945.4,5008.64 h60
  text "OTHER" at 13358.46,5008.64 h60
  text "TOLERANCE:" at 11407.23,4850.64 h60
  text "X" at 12246.53,4850.64 h60
  text "ANSI IPC-6012 TYPE 3 CLASS 2" at 12433.48,4850.64 h60
  text "OTHER +/-" at 12433.46,4694.64 h60
  text "BOW & TWIST:" at 11407.23,4537.64 h60
  text "X" at 12246.53,4537.64 h60
  text "ANSI IPC-6012 TYPE 3 CLASS 2" at 12433.48,4537.64 h60
  text "OTHER +/-" at 12433.46,4379.13 h60
  text "COPPER THICKNESS (FINISHED):" at 11332.46,4243.64 h60
  text "1.4MIL (1oz)" at 12212.46,4090.92 h60
  text "2MIL (1.4oz)" at 12979.46,4090.92 h60
  text "2.8MIL (2oz)" at 13706.46,4090.92 h60
  text "OUTER:" at 11689.46,4086.64 h60
  text "X" at 13580,4085 h60
  text "1.4MIL (1oz)" at 12212.46,3933.92 h60
  text "2.8MIL (2oz)" at 12979.46,3933.92 h60
  text "N/A" at 13706,3934.29 h60
  text "INNER SIGNAL:" at 11400.38,3929.64 h60
  text "X" at 13575,3925 h60
  text "DRILLING:" at 11332.46,3790.64 h60
  text "REFERENCE:" at 11407.23,3673.64 h60
  text "X" at 12055.46,3673.64 h60
  text "AS SHOWN" at 12242.46,3673.64 h60
  text "X" at 12956.46,3673.64 h60
  text "NC_DRILL FILES" at 13093.46,3673.64 h60
  text "PTH MIN COPPER THICKNESS:" at 11407.23,3515.64 h60
  text "X" at 12757.46,3515.64 h60
  text "1MIL" at 12894.46,3515.64 h60
  text "OTHER" at 13391.46,3515.64 h60
  text "BOARD FINISH:" at 11332.46,3356.64 h60
  text "SILKSCREEN:" at 11487.68,3238.64 h60
  text "X" at 12436.46,3238.64 h60
  text "TOP" at 12562.46,3238.64 h60
  text "BOTTOM" at 13073.46,3238.64 h60
  text "SILKSCREEN COLOR:" at 11487.68,3071.64 h60
  text "X" at 12435.42,3071.64 h60
  text "WHITE" at 12562.46,3071.64 h60
  text "OTHER" at 13073.46,3071.64 h60
  text "SOLDER RESIST COLOR:" at 11487.68,2901.64 h60
  text "X" at 12055.42,2742.44 h60
  text "GREEN" at 12182.46,2742.44 h60
  text "BLUE" at 12773.46,2742.44 h60
  text "OTHER" at 13311.46,2742.44 h60
  text "IMMERSION GOLD (ENIG)" at 12393.46,2553.92 h60
  text "ENEPIG" at 13731,2550.64 h60
  text "SURFACE FINISH:" at 11332.46,2549.64 h60
  text "IMM. TIN/SILVER OR EQUIV" at 11662,2392.64 h60
  text "OTHER" at 13093.46,2392.64 h60
  text "X" at 11505,2390 h60
  text "ARRAY/PANEL:" at 11332.46,2213.64 h60
  text "CUT AND TRIM PER MECH LAYER 1" at 12393.46,2209.35 h60
  text "N.C. ROUTE" at 12393.46,2057.64 h60
  text "X" at 13072.46,2057.64 h60
  text "V. SCORE" at 13259.46,2057.64 h60
  text "CERTIFICATION:" at 11332.46,1920.64 h60
  text "MATERIALS AND WORKMANSHIP FOR ALL PCBS" at 12057.46,1920.64 h60
  text "TO MEET OR EXCEED THE REQUIREMENTS OF:" at 12057.46,1822.64 h60
  text "X" at 11683.96,1686.13 h60
  text "ANSI IPC-A-600F CLASS ->" at 11822.96,1686.13 h60
  text "X" at 13462.02,1686.13 h60
  text "2" at 13580.96,1686.14 h60
  text "1" at 13265.96,1684.64 h60
  text "3" at 13934.96,1684.64 h60
  text "X" at 11686.02,1526.64 h60
  text "UL 94V-0" at 11822.96,1526.64 h60
  text "X" at 12498.02,1526.64 h60
  text "RoHS" at 12634.96,1526.64 h60
  text "OTHER" at 13279.36,1526.64 h60
  text "PER ORDER" at 13676.42,1526.64 h60
  text "ADDITIONAL REQUIREMENTS:" at 11332.46,1385.64 h60
  text "MICROSECTION:" at 11407.23,1270.64 h60
  text "YES" at 12312.96,1270.64 h60
  text "REQUIRED" at 13174.46,1114.49 h60
  text "BARE BOARD ELEC. TEST:" at 11407.23,1111.64 h60
  text "NONE" at 12712.96,1111.64 h60
  text "X" at 13047.46,1111.64 h60
  text "PER ORDER" at 13766.46,1111.64 h60
  text "MANUFACTURER'S UL:" at 11407.23,954.64 h60
  text "RAIL" at 12572.96,950.35 h60
  text "METAL" at 13064.77,950.35 h60
  text "X" at 13440,950 h60
  text "SILK" at 13576.46,950.35 h60
  text ".Layer_Name" at 577,-858.49 h60
M11 Gerber Information:
  lines w10: -292,-930.17 6308,-930.17 ; -292,-726.83 6310,-726.83 ; -292,-523.5 -292,-1133.5 3713,-1133.5 6310,-1133.5 6310,-523.5 -291.5,-523.5 -291.5,-1133.5 1284,-1133.5 ; 2173,-1133.5 2173,-523.5 ; 3440,-726.83 3440,-523.5 ; 4280,-726.83 4280,-523.5 ; 4902,-1140 4902,-937.17
  text "ALL ARTWORK VIEWED FROM TOP SIDE" at -228.5,-655.67 h60
  text "BOARD #:" at 2248,-655.67 h60
  text ".PRJ_Number" at 2793.5,-655.67 h60
  text "REV:" at 3638,-655.67 h60
  text ".PCB_Rev" at 3929.5,-655.67 h60
  text "SVN REV:" at 4476,-655.67 h60
  text ".VersionControl_RevNumber" at 4982,-655.67 h60
  text "LAYER NAME =" at -228.5,-858.49 h60
  text "PLOT NAME =" at -228.5,-1064.34 h60
  text ".plot_File_Name" at 577,-1064.34 h60
  text "GENERATED    :" at 2250,-1064.34 h60
  text ".Print_Date" at 3119.5,-1064.34 h60
  text ".Print_Time" at 3848.5,-1064.34 h60
  text "TEXAS INSTRUMENTS" at 5113,-1064.34 h60
M12 Stackup:
  lines w6: 11360,7460 13910,7460 ; 11360,7564.4 13910,7564.4 ; 11300,6975 ccw(c11334,6975) 11334,6941 13936,6941 ccw(c13936,6975) 13970,6975 13970,7681 ccw(c13936,7681) 13936,7715 11334,7715 ccw(c11334,7681) 11300,7681 11300,6975
  text "The Stackup Legend below this is static." at 11605.5,7874.5 h60
  text "If you change the stackup, update the Legend." at 11615.5,7784.5 h60
  text "Layer Stack Up Detail for: Ref_Design.PcbDoc" at 11360,7597.1 h57
  text "Layer" at 11360,7525.4 h24
  text "Gerber" at 12255.81,7525.4 h24
  text "Copper" at 12819.33,7525.4 h24
  text "Dielectric" at 13422.04,7525.4 h24
  text "Name" at 11360,7477.4 h24
  text "Document" at 12255.81,7477.4 h24
  text "Thickness" at 12819.33,7477.4 h24
  text "Material" at 13422.04,7477.4 h24
  text "Top Solder Mask" at 11360,7384.44 h34
  text "(.GTS)" at 12255.81,7384.44 h34
  text "Solder Resist" at 13422.04,7384.44 h34
  text "Top Layer" at 11360,7287.69 h34
  text "(.GTL)" at 12255.81,7287.69 h34
  text "2.8mil" at 12819.33,7287.69 h34
  text "FR-4" at 13422.04,7239.31 h34
  text "Bottom Layer" at 11360,7190.94 h34
  text "(.GBL)" at 12255.81,7190.94 h34
  text "2.8mil" at 12819.33,7190.94 h34
  text "Bottom Solder Mask" at 11360,7094.19 h34
  text "(.GBS)" at 12255.81,7094.19 h34
  text "Solder Resist" at 13422.04,7094.19 h34
  text ".Layer_Name" at 577,-858.49 h60
M13 Component Bodies Top:
  text ".Layer_Name" at 577,-858.49 h60
M14 Component Bodies Bottom:
  text ".Layer_Name" at 577,-858.49 h60
M15 Courtyards Top:
  text ".Layer_Name" at 577,-858.49 h60
M16 Courtyards Bottom:
  text ".Layer_Name" at 577,-858.49 h60
Drill Drawing:
  text ".legend" at 5122.5,725.5 h60
  text "Drill Table" at 5147.5,540.5 h60
  text ".Layer_Name" at 577,-858.49 h60

## Dimensions
0,0 to 3100,0 on M2 Board Dimensions
0,2000 to 0,0 on M2 Board Dimensions

## Text inside footprints (layer, text, board x,y; h text height)
C3: Top Overlay "+" at 1408.74,673.62 h51.18 r180; M5 Assembly Top "+" at 1408.74,673.62 h51.18 r180
C7: Top Overlay "+" at 1919.68,1136.85 h40 r90; M5 Assembly Top "+" at 1919.68,1136.85 h40 r90
C8: Top Overlay "+" at 2499.68,1136.85 h40 r90; M5 Assembly Top "+" at 2499.68,1136.85 h40 r90
U2: M5 Assembly Top "*" at 2288.9,832 h30